# Altium PCB Bluetooth.PcbDoc
Units mil, origin at the board's own origin, x right, y up, seen from the top; angles counter-clockwise.
Board outline 1388.85 x 1357.71 mil, 2 copper layers (Top Layer, Bottom Layer), stack 62.209 mil thick; 16 components, 11 nets, 39 pads, 7 vias.
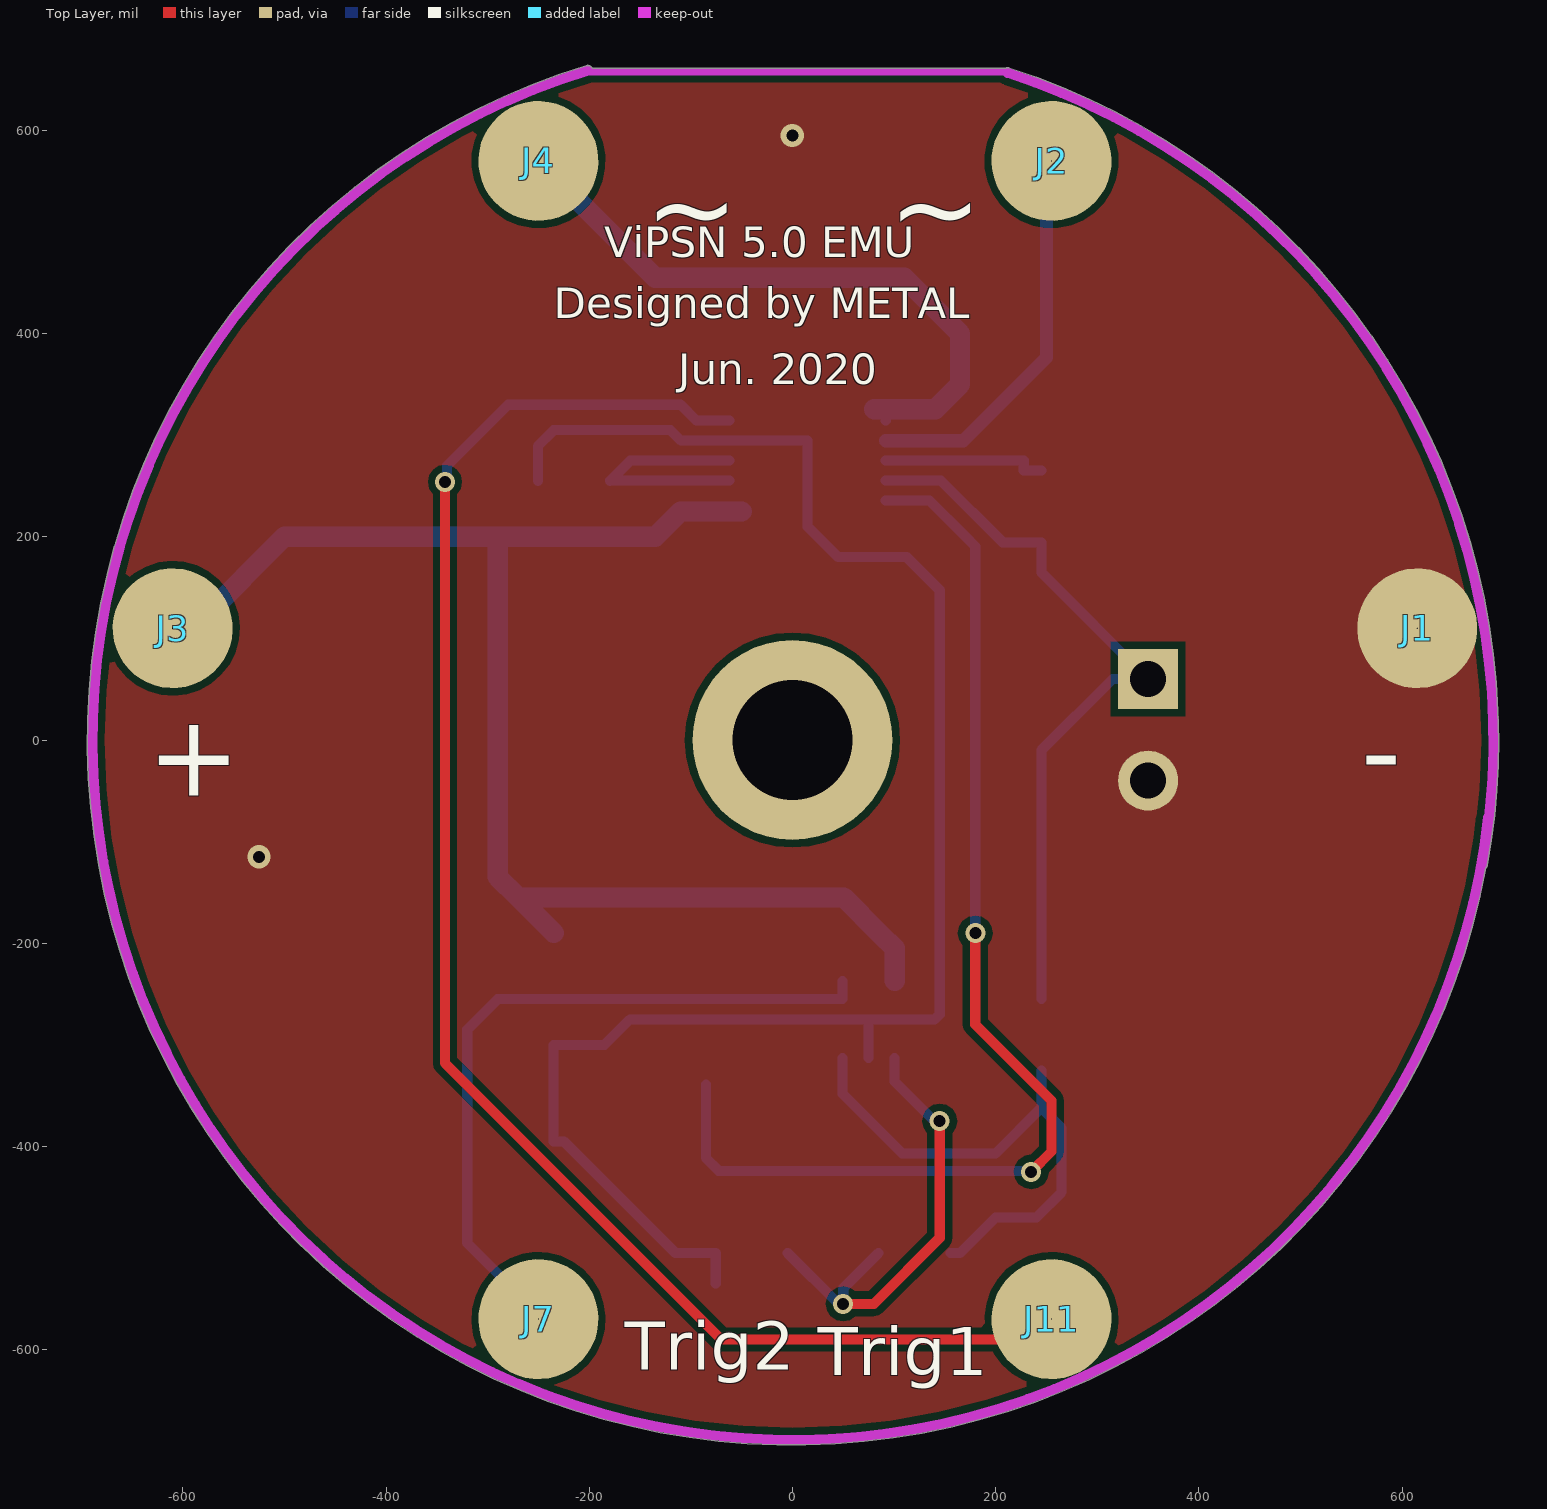
[diagram p0: Top Layer view]
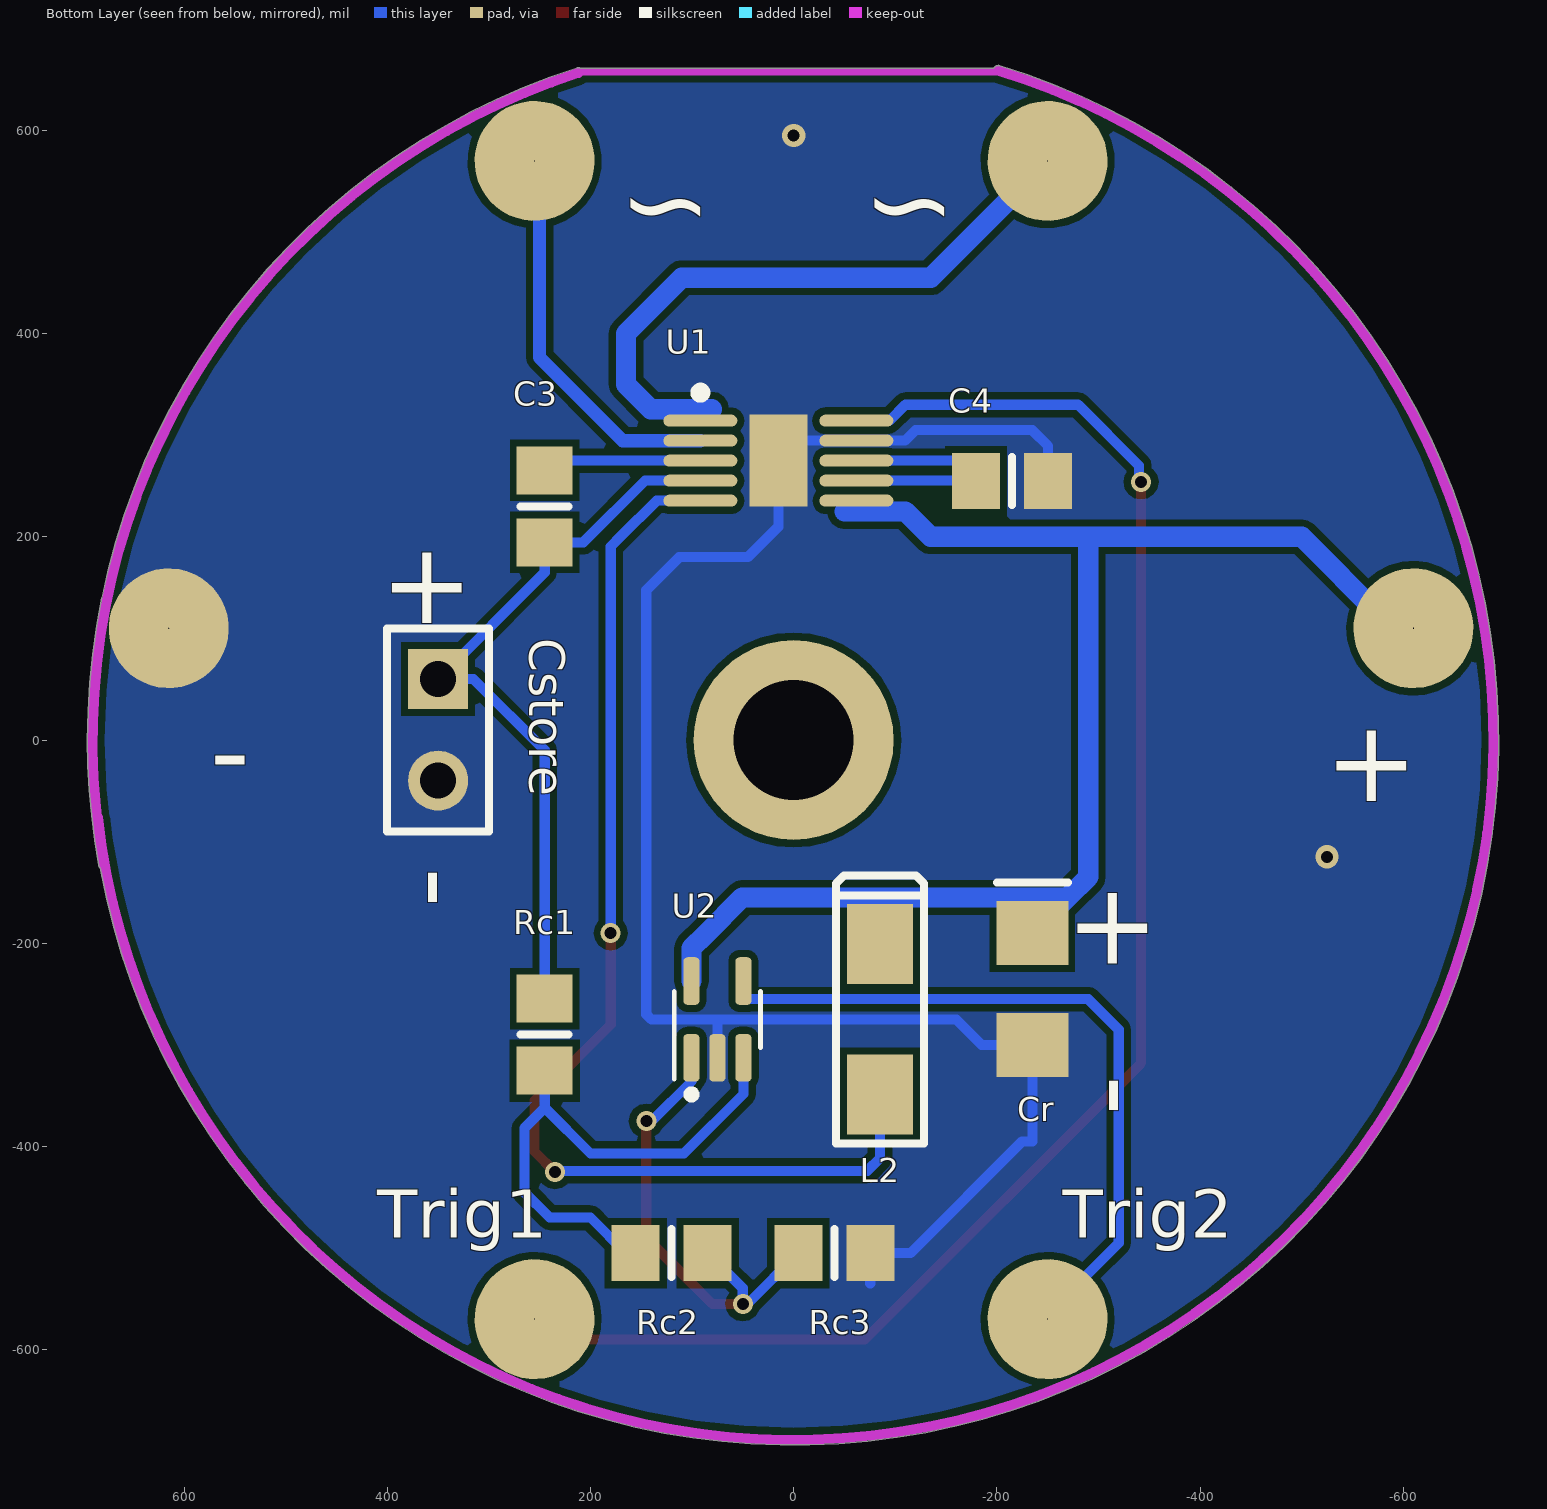
[diagram p1: Bottom Layer view, seen from below]

## Layer stack, top to bottom
Top Layer: signal copper 1.4
Dielectric: dielectric 59.4094, FR-4, Dk 4.8
Bottom Layer: signal copper 1.4

## Board outline
682.57,-125.84 cw(c0.1,0.1) -202.93,663.73 cw(c-201.47,658.93) -197.05,661.31 209.93,661.31 cw(c211.84,656.68) 213.38,661.45 cw(c0,0) 695.01,0 cw(c0,0) 684.02,-123.11 cw(c679.09,-122.22)

## Design rules (kind name [scope] priority, off if disabled: settings)
Clearance [All] p1: gap=7
ComponentClearance [All] p1: gap=0 collisioncheckmode=3 verticalgap=0 showdistances=FALSE
PlaneConnect [All] p1: planeconnectstyle=Direct reliefexpansion=20 reliefentries=4 reliefconductorwidth=10 reliefairgap=10
PolygonConnect [All] p1: connectstyle=Direct reliefconductorwidth=10 reliefentries=4 polygonreliefangle="90 Angle"
RoutingVias [All] p1: holewidth=28 width=50 viastyle="Through Hole" minholewidth=28 minwidth=50 maxholewidth=28 maxwidth=50
SilkscreenOverComponentPads [IsPad] p1: minsilkscreentomaskgap=10
SolderMaskExpansion [All] p1: expansion=4
Width [All] p1: maxlimit=100 minlimit=7 preferedwidth=50
25 further rules are at their usual default settings.

## Components (designator, comment, footprint, x,y, rotation, side; value= is the part's Value field where it differs from the comment)
C3 "CAP" 6-0805_N 245,230 r270 bottom
C4 "CAP" 6-0805_N -215,255 r180 bottom
Cr "6.3V" 3216[1206] -235,-245 r270 bottom
Cstore "Cap Pol1" HDR1X2 350,60 r270 bottom
J1 "Socket" PIN1 615,110 r100 top
J2 "Socket" PIN1 255,570 r130 top
J3 "Socket" PIN1 -610,110 r260 top
J4 "Socket" PIN1 -250,570 r230 top
J7 "Socket" PIN1 -250,-570 r340 top
J11 "Socket" PIN1 255,-570 r20 top
L2 "10uH" "SMD SS16" -85,-275 r90 bottom
Rc1 "Res1" 6-0805_N 245,-290 r90 bottom
Rc2 "Res1" 6-0805_N 120,-505 r0 bottom
Rc3 "Res1" 6-0805_N -40,-505 r0 bottom
U1 "LTC3588-1" "LTC 3588-1" 15,275 r180 bottom
U2 "MIC841" SOT65P210X90-5L20N 75,-275 r180 bottom

## Footprints (in the part's own frame and the unit in brackets; to place one, negate y for a bottom-side part, rotate by r counter-clockwise, add the part's x,y. Pads: shape width x height; smd on the part's side, far side on the other; paste and mask are expansions set on the pad)
6-0805_N [mm] "Chip Resistor, Body 2.0x1.2mm, IPC Medium Density"
  rect 1.2x1.4 smd: 1(-0.9,0) 2(0.9,0)
  silkscreen extent 0,-0.6 0,0.6, body extent -1.07,-0.7 1.07,0.7, height 0.7
3216[1206] [mm] "Chip Resistor; Body 3.2 x 1.6 mm (LxW typ)"
  rect 1.6x1.8 smd: 1(-1.4,0) 2(1.4,0)
  silkscreen extent -2.67,-0.89 -2.67,0.89
HDR1X2 [mm] "Connector; Header; 2 Position"
  rect 1.5x1.5 hole 0.9: 1(0,0)
  round 1.5 hole 0.9: 2(2.54,0)
  silkscreen extent -1.27,-1.27 3.81,1.27
"LTC 3588-1" [mm] "10-Lead Plastic MSOP"
  oval 1.85x0.3 smd: 1(-1.95,1) 2(-1.95,0.5) 3(-1.95,0) 4(-1.95,-0.5) 5(-1.95,-1) 6(1.95,-1) 7(1.95,-0.5) 8(1.95,0) 9(1.95,0.5) 10(1.95,1)
  rect 1.45x2.3 smd: 11(0,0)
  silkscreen extent -2.08,1.58 -1.83,1.82, body extent -1.55,-1.55 1.55,1.55, height 1.1
PIN1 [mm] "Connector; Plug"
  round 3 hole 0.015: 1(0,0)
"SMD SS16" [mm]
  rect 2x1.65 smd: 1(-1.88,0) 2(1.88,0)
  silkscreen extent -3.1,-1.1 3.6,1.1
SOT65P210X90-5L20N [mm] "Small Outline Transistor (SOT23), 0.65 mm pitch; 5 pin, 2.00 mm L X 1.25 mm W X 0.90 mm H body"
  rrect50% 0.4x1.19 smd: 1(-0.65,-0.96) 2(0,-0.96) 3(0.65,-0.96) 4(0.65,0.96) 5(-0.65,0.96)
  silkscreen extent -1.08,-1.97 1.08,0.7

## Part data
C3 C4: "Capacitor"
Cr: library part "Cap Pol1", "Polarized Capacitor (Radial)"
Cstore: "Polarized Capacitor (Radial)"
L2: library part INDUCTOR
Rc1 Rc2 Rc3: "Resistor"
U1: "Nanopower energy harvesting power supply"
U2: library part Component_1

## Free pads (board coordinates)
  round 196.85 hole 118.11: 0(0,0)

## Via types
v1: diameter 19.68, hole 11.81, Top Layer to Bottom Layer, 5 vias
v2: diameter 23, hole 12, Top Layer to Bottom Layer, 2 vias

## Nets (pads, with @x,y where several pads share a name; then routed paths per layer and width w, separated by ;. In a path a pad name is that pad's centre, name@x,y a point inside that pad or via, vN(x,y) a via of type N, cw(c..) or ccw(c..) an arc to the next point about the centre after c; other vN are vias at no path point)
EXTI: U2.4 | length 673.3
  Bottom Layer w10: -275,-540 -320,-495 -320,-285 -290,-255 49.41,-255 U2.4
GND: C4.2 Cr.2 Cstore.2 J1.1 Rc3.1 U1.9 U1.11 U2.2 | length 1736.1
  Bottom Layer w10: C4.2 -250.43,289.57 -235,305 -120,305 -109.69,294.69 U1.9 15,294.69 U1.11 15,210 45,180 112.5,180 145,147.5 145,-160 ; -75.43,-534.57 Rc3.1 -115,-505 -225,-395 -235,-395 Cr.2 -185.12,-300.12 -160,-275 75,-275 ; U2.2 75,-275 ; 145,-152.5 145,-160 ; 75,-275 140,-275 145,-270 145,-160
  other v2: -525,-115 0,595
HTH: Rc2.1 Rc3.2 U2.1 | length 515.7
  Top Layer w10: v1(50,-555) 80,-555 145,-490 145,-395 ; 145,-455 145,-395 ; v1(145,-375) 145,-395
  Bottom Layer w10: Rc3.2 v1@45.43,-555 ; v1(50,-555) 50,-539.57 Rc2.1 ; U2.1 100.59,-336 139.59,-375 v1(145,-375)
LTH: Rc1.1 Rc2.2 U2.3 | length 536.4
  Bottom Layer w10: U2.3 49.41,-348.41 108,-407 200,-407 245,-362 ; Rc2.2 165,-505 200,-470 240,-470 265,-445 265,-382 245,-362 ; Rc1.1 245,-362
NetC3_1: C3.1 U1.3 | length 162.8
  Bottom Layer w10: U1.3 227.65,275 227.65,265.43 C3.1
NetC4_1: C4.1 U1.7 U1.8 | length 243.6
  Bottom Layer w10: C4.1 C4.1@-179.25,255.32 ; U1.7 C4.1@-179.25,255.32 ; U1.8 -159.57,275 C4.1@-179.25,255.32
NetL2_1: L2.1 U1.5 | length 1161.4
  Top Layer w10: v1(180,-190) 180,-280 255,-355 255,-405 v1(235,-425)
  Bottom Layer w10: L2.1@-85,-339.02 L2.1 -85,-411.5 -72.5,-424 v1@237,-424 ; U1.5 134.87,235.63 170,200.5 180,190.5 v1(180,-190)
VIN+: J4.1 U1.1 | length 630.2
  Bottom Layer w10: U1.1 U1.1@92,314.37
  Bottom Layer w20: J4.1 -135,455 110,455 165,400 165,350 140.57,325.57 80.57,325.57
VIN-: U1.2 | length 385.6
  Bottom Layer w13: U1.2 168.19,294.69 250,376.5 250,570
VOUT: Cr.1 L2.2 U1.6 U2.5 | length 1409.6
  Bottom Layer w20: -580,120 -500,200 -290,200 ; Cr.1 -269.94,-154.94 ; -50,225 -110,225 -135,200 -290,200 ; U2.5 100.59,-205 86.57,-190.98 50.53,-154.94 -269.94,-154.94 ; -290,200 -290,-134.88 -269.94,-154.94
VSTO: C3.2 Cstore.1 Rc1.2 U1.4 | length 735
  Bottom Layer w10: U1.4 146.25,255.32 207,194.57 C3.2 245,165 Cstore.1 315,60 245,-10 Rc1.2
pads on no net: J2.1 J3.1 J7.1 J11.1 U1.10
copper on no net: | length 1574.2
  Top Layer w10: -342,-203 -342,-195 ; v1(-342,254) -342,-65 -342,-180 -342,-195 ; 215,-590 -70,-590 -342,-318 -342,-195
  Bottom Layer w10: v1@-340,255 -340,270 -280,330 -110,330 -94.37,314.37 -61.77,314.37

## Polygon pours and split planes (outlines as drawn)
GND on Top Layer "Top Layer-No Net" (solid, remove dead copper, pour order 1000): -780,780 -750,750 835,750 835,-770 655,-950 445,-740 -785,-740 -785,670 -645,810
GND on Bottom Layer "Top Layer-No Net" (solid, remove dead copper, pour order 1001): -775,725 -765,735 830,735 830,-745 715,-860 600,-745 -820,-745 -820,565 -585,800

## Keep-outs
Keep-Out Layer:
  lines w7: -265,635 -262.2,637.8 ; -209.55,657.8 212.2,657.8
  lines w10: -201.47,658.93 ccw(c0.1,0.1) 684.85,-76.1 ; 211.84,656.68 cw(c0,0) 679.09,-122.22

## Silkscreen, mask and mechanical layers (free items; w line width, h text height)
Top Overlay:
  text "~" at -145,485 h80
  text "~" at 95,485 h80
  text "ViPSN 5.0 EMU" at -185,475 h30
  text "Designed by METAL" at -234.98,415 h30
  text "Jun. 2020" at -112.52,350 h30
  text "-" at 560,-50 h80
  text "+" at -635,-55 h80
  text "Trig2" at -165,-620 h47.24
  text "Trig1" at 25,-625 h47.24
Bottom Overlay:
  text "~" at -160,490 h80
  text "~" at 80,490 h80
  text "+" at 315,115 h80
  text "-" at 535,-50 h80
  text "+" at -615,-60 h80
  text "-" at 385,-165 h80 r90
  text "+" at -360,-220 h80
  text "-" at -285,-370 h80 r90
  text "Trig2" at -265,-490 h47.24
  text "Trig1" at 410,-490 h47.24